# EAGLE board axiom_beta_board_100_v0.8_test-default.6734f072 (EAGLE 7.7.0), part 1 of 2
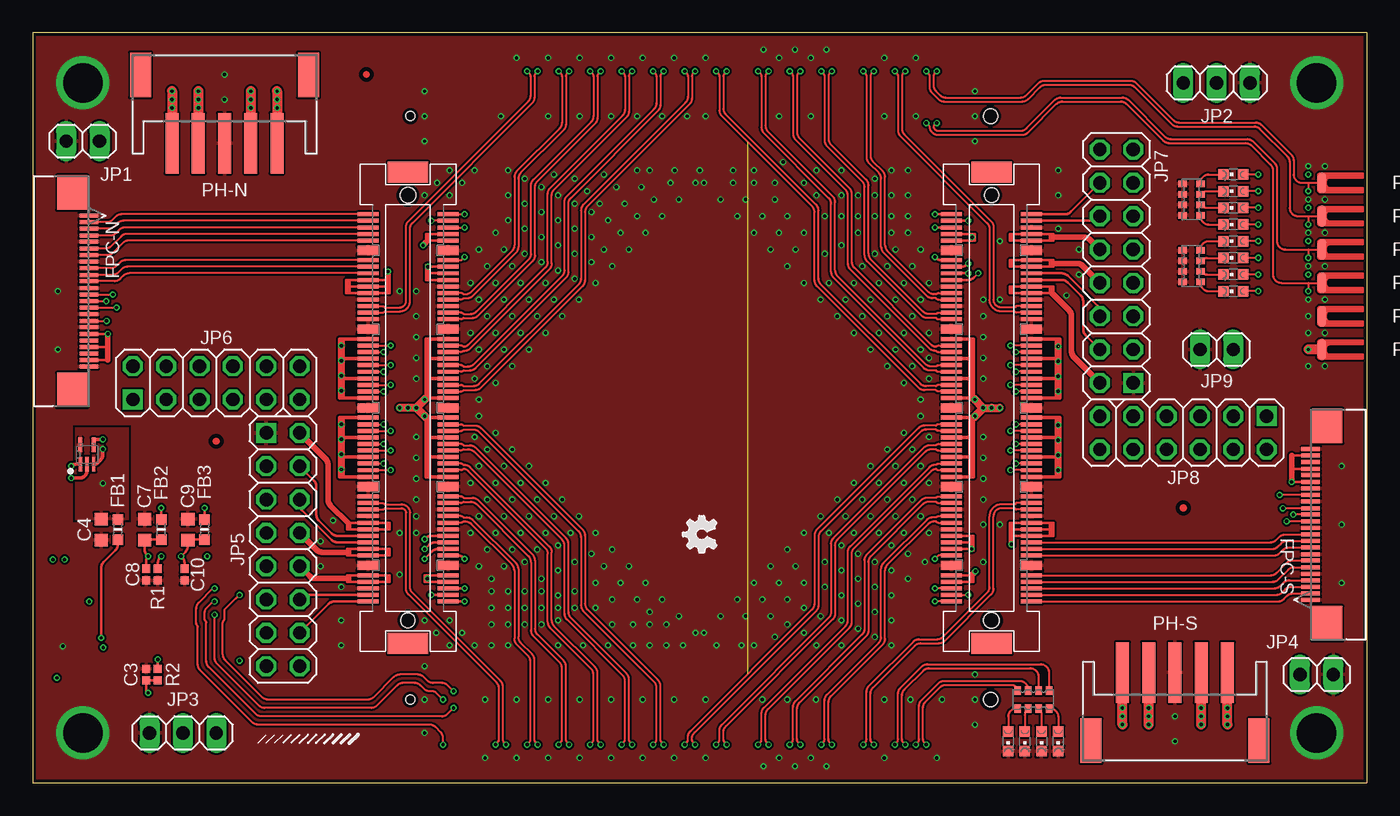
[diagram p0: board, top side]
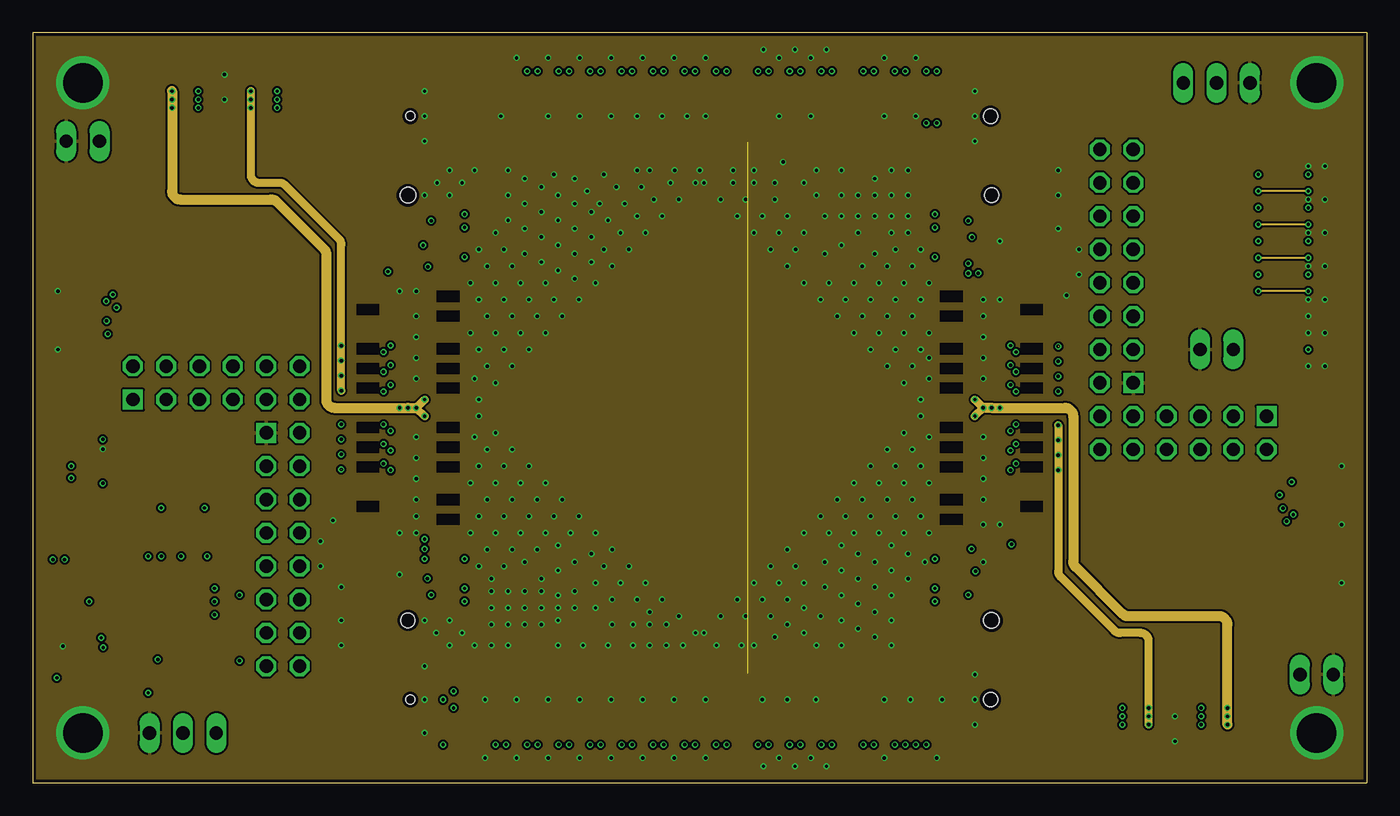
[diagram p1: board, inner layer Route2]
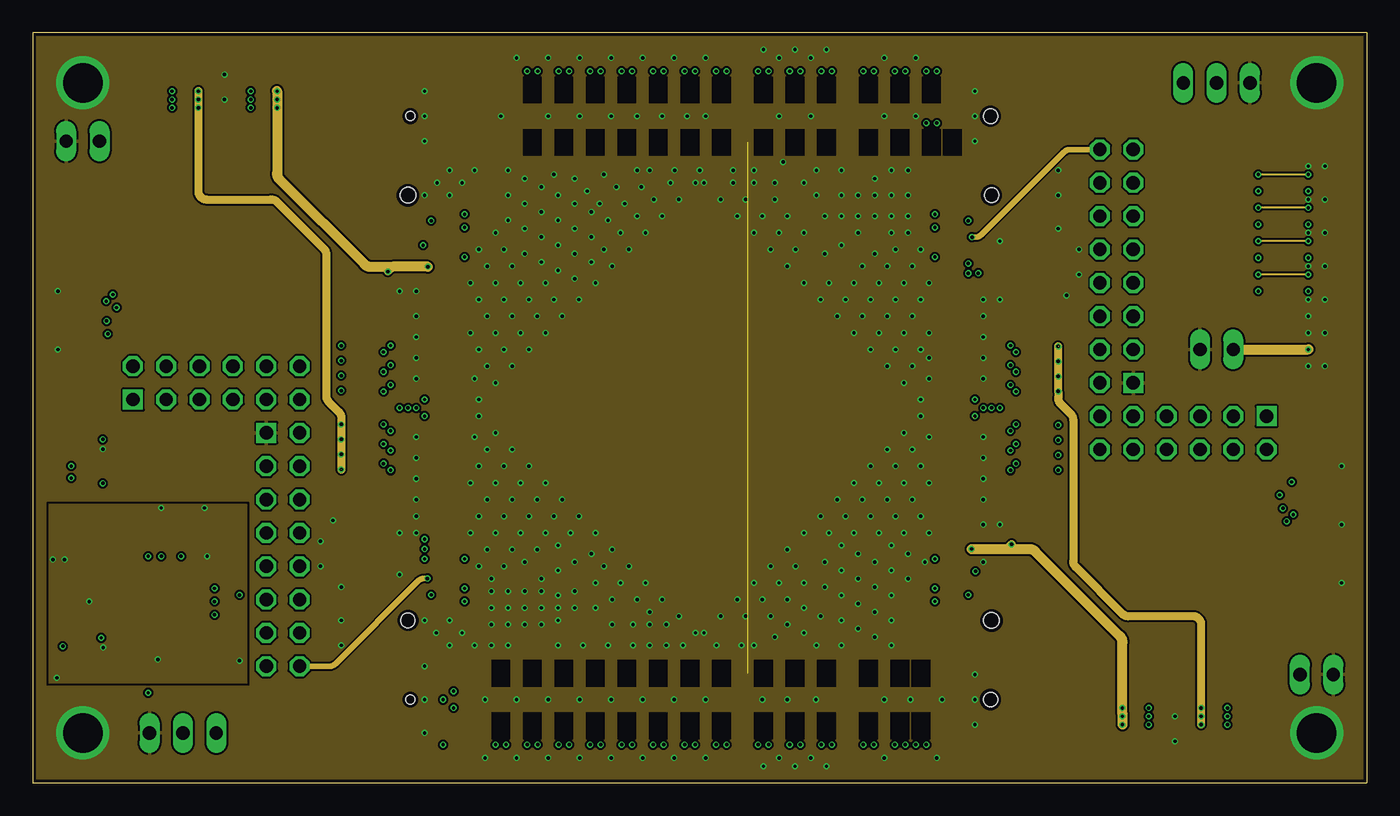
[diagram p2: board, inner layer Route15]
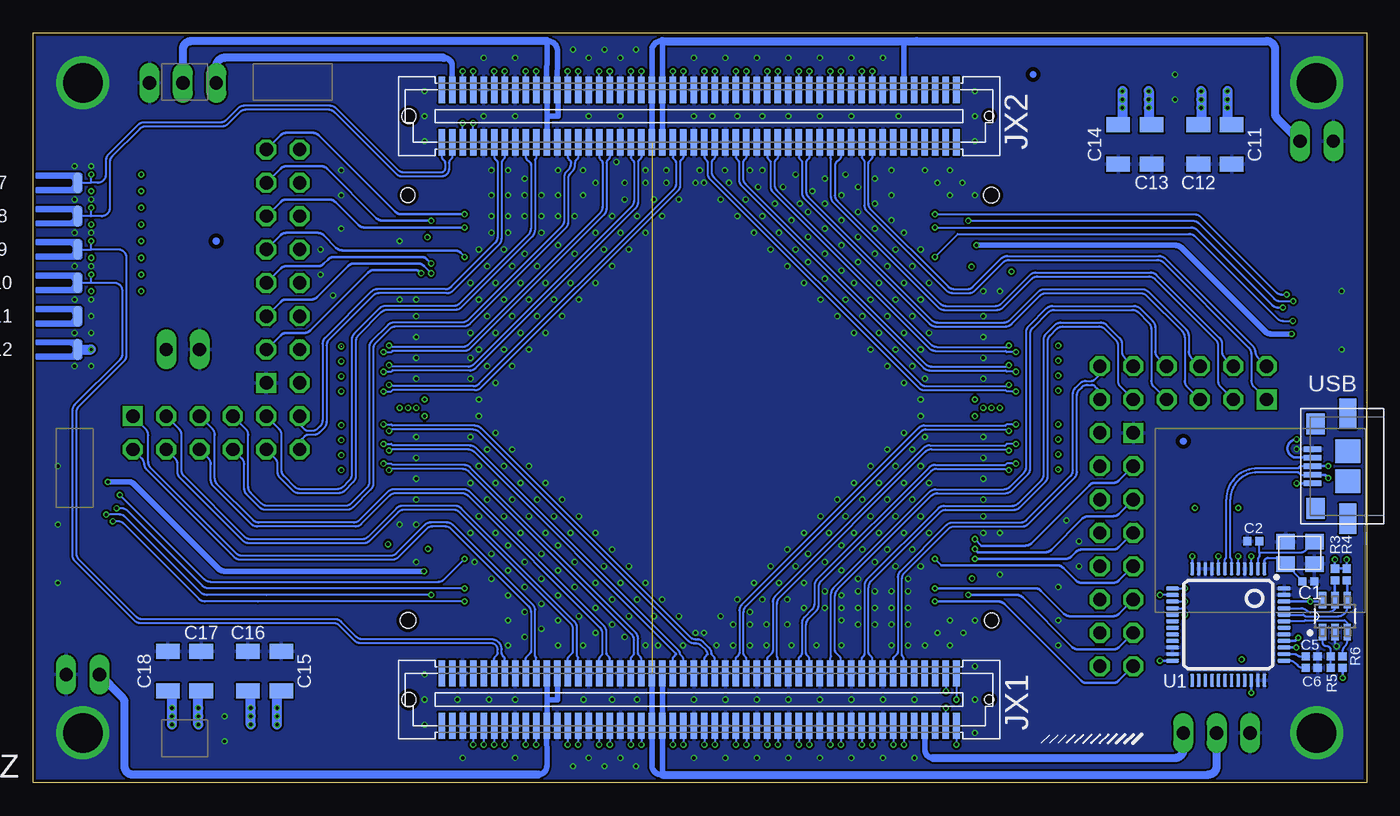
[diagram p3: board, bottom side, seen from below]

Size 101.6 x 57.15 mm. Coordinates in mm from the lower left corner, seen from the top.
Outline: 0,0 101.6,0 101.6,57.15 0,57.15 0,0
Copper layers (1*2*15*16): Top 0.035559375mm / dielectric 0.17018125mm / Route2 0.01778125mm / dielectric 47mil / Route15 0.01778125mm / dielectric 0.17018125mm / Bottom 0.035559375mm
Design rules "OSHPark-4layer-tuned *": minimum track width 5mil, minimum drill 10mil, track to track 6mil, track to pad 5mil, pad to pad 5mil, via to via 5mil, smd to smd 5mil, copper to edge 10mil, drill to drill 6mil, minimum pad ring 4mil, minimum via ring 4mil, stop-mask expansion 2mil, vias tented up to drill 15mil, thermal gap 6mil
Net classes: 0 default: width 0.152 mm, drill 0.254 mm, clearance 0.152 mm; 1 LVDS: width 0.152 mm, drill 0.254 mm, clearance 0.152 mm
tKeepout: area 1.3,1.3 to 6.3,6.3; area 1.3,50.8 to 6.3,55.8; area 95.3,50.8 to 100.3,55.8; area 95.3,1.3 to 100.3,6.3; area 34.6,12.4 to 67,44.7
bKeepout: area 1.3,1.3 to 6.3,6.3; area 1.3,50.8 to 6.3,55.8; area 95.3,50.8 to 100.3,55.8; area 95.3,1.3 to 100.3,6.3
tRestrict: area 13.4,25.5 to 14.5,26.6; area 24.8,53.4 to 26,54.5; area 87.1,20.4 to 88.2,21.5
bRestrict: area 13.4,25.5 to 14.5,26.6; area 24.8,53.4 to 26,54.5; area 87.1,40.7 to 88.2,41.8

## Footprints (pad centres in the part's own frame; a part is rotated, then mirrored left to right if it is on the bottom)
0402-B = smd 0.62 x 0.62: 1 -0.45,0; 2 0.45,0
0603-B = smd 0.95 x 1: 1 -0.8,0; 2 0.8,0
1206-B = smd 1.15 x 1.8: 1 -1.5,0; 2 1.5,0
_0603MP = smd 0.8 x 0.8: 1 -0.762,0; 2 0.762,0
FCI_SFV24R-2STE1LF = smd 0.305 x 1.397: 1 5.74,2.083; 2 5.258,2.083; 3 4.75,2.083; 4 4.242,2.083; 5 3.759,2.083; 6 3.251,2.083; 7 2.743,2.083; 8 2.261,2.083; 9 1.753,2.083; 10 1.245,2.083; 11 0.762,2.083; 12 0.254,2.083; 13 -0.254,2.083; 14 -0.762,2.083; 15 -1.245,2.083; 16 -1.753,2.083; 17 -2.261,2.083; 18 -2.743,2.083; 19 -3.251,2.083; 20 -3.759,2.083; 21 -4.242,2.083; 22 -4.75,2.083; 23 -5.258,2.083; 24 -5.74,2.083 | smd 2.642 x 2.311: 25 -7.518,3.353; 26 7.518,3.353
1X02 = drill 1.016 long: 1 -1.27,0; 2 1.27,0
1X03 = drill 1.016 long: 1 -2.54,0; 2 0,0; 3 2.54,0
2X08 = drill 1.016 square: 1 -8.89,-1.27 | drill 1.016 octagon: 2 -8.89,1.27; 3 -6.35,-1.27; 4 -6.35,1.27; 5 -3.81,-1.27; 6 -3.81,1.27; 7 -1.27,-1.27; 8 -1.27,1.27; 9 1.27,-1.27; 10 1.27,1.27; 11 3.81,-1.27; 12 3.81,1.27; 13 6.35,-1.27; 14 6.35,1.27; 15 8.89,-1.27; 16 8.89,1.27
2X06 = drill 1.016 square: 1 -6.35,-1.27 | drill 1.016 octagon: 2 -6.35,1.27; 3 -3.81,-1.27; 4 -3.81,1.27; 5 -1.27,-1.27; 6 -1.27,1.27; 7 1.27,-1.27; 8 1.27,1.27; 9 3.81,-1.27; 10 3.81,1.27; 11 6.35,-1.27; 12 6.35,1.27
CHIPLED_0603 = smd 0.8 x 0.8: A 0,-0.75; C 0,0.75
1.6X3.8U-MM = smd 1.6 x 0.6: 1 0,-1.5
JST-PH-5-SMT-RA = smd 1 x 4.6: 1 -4,-2.7; 2 -2,-2.7; 3 0,-2.7; 4 2,-2.7; 5 4,-2.7 | smd 1.6 x 3.4: M1 -6.4,2.5; M2 6.4,2.5
ABM8G = smd 1.4 x 1.2: 1 -1.1,-0.85; 2 1.1,-0.85; 3 1.1,0.85; 4 -1.1,0.85
CAY16 = smd 0.5 x 0.65: 1 -1.2,-0.675; 2 -0.4,-0.675; 3 0.4,-0.675; 4 1.2,-0.675; 5 1.2,0.675; 6 0.4,0.675; 7 -0.4,0.675; 8 -1.2,0.675
LQFP48 = smd 0.3 x 1: 1 -2.75,-4.25; 2 -2.25,-4.25; 3 -1.75,-4.25; 4 -1.25,-4.25; 5 -0.75,-4.25; 6 -0.25,-4.25; 7 0.25,-4.25; 8 0.75,-4.25; 9 1.25,-4.25; 10 1.75,-4.25; 11 2.25,-4.25; 12 2.75,-4.25; 25 2.75,4.25; 26 2.25,4.25; 27 1.75,4.25; 28 1.25,4.25; 29 0.75,4.25; 30 0.25,4.25; 31 -0.25,4.25; 32 -0.75,4.25; 33 -1.25,4.25; 34 -1.75,4.25; 35 -2.25,4.25; 36 -2.75,4.25 | smd 1 x 0.3: 13 4.25,-2.75; 14 4.25,-2.25; 15 4.25,-1.75; 16 4.25,-1.25; 17 4.25,-0.75; 18 4.25,-0.25; 19 4.25,0.25; 20 4.25,0.75; 21 4.25,1.25; 22 4.25,1.75; 23 4.25,2.25; 24 4.25,2.75; 37 -4.25,2.75; 38 -4.25,2.25; 39 -4.25,1.75; 40 -4.25,1.25; 41 -4.25,0.75; 42 -4.25,0.25; 43 -4.25,-0.25; 44 -4.25,-0.75; 45 -4.25,-1.25; 46 -4.25,-1.75; 47 -4.25,-2.25; 48 -4.25,-2.75
SOT95P280X145-6N = smd 1.27 x 0.559: 1 -1.219,0.94; 2 -1.219,0; 3 -1.219,-0.94; 4 1.219,-0.94; 5 1.219,0; 6 1.219,0.94
SOT50P160X60-5N = smd 1.118 x 0.254: 1 -0.737,0.508; 2 -0.737,0; 3 -0.737,-0.508 | smd 1.118 x 0.305: 4 0.737,-0.508; 5 0.737,0.508
MICRO-AB-H-SMT = smd 0.4 x 1.35: 1 -1.3,4.125; 2 -0.65,4.125; 3 0,4.125; 4 0.65,4.125; 5 1.3,4.125 | smd 2.3 x 1.3: Z1 -4,1.45; Z4 4,1.45 | smd 1.8 x 1.9: Z2 -1.15,1.45; Z3 1.15,1.45 | smd 1.6 x 1.4: Z5 -3.2,3.9; Z6 3.2,3.9
FX10A-100S/10 = smd 0.3 x 1.6: 1 -14.75,-3.05; 2 -14.75,3.05; 3 -14.25,-3.05; 4 -14.25,3.05; 5 -13.75,-3.05; 6 -13.75,3.05; 7 -13.25,-3.05; 8 -13.25,3.05; 9 -12.75,-3.05; 10 -12.75,3.05; 11 -11.25,-3.05; 12 -11.25,3.05; 13 -10.75,-3.05; 14 -10.75,3.05; 15 -10.25,-3.05; 16 -10.25,3.05; 17 -9.75,-3.05; 18 -9.75,3.05; 19 -9.25,-3.05; 20 -9.25,3.05; 21 -8.75,-3.05; 22 -8.75,3.05; 23 -8.25,-3.05; 24 -8.25,3.05; 25 -7.75,-3.05; 26 -7.75,3.05; 27 -7.25,-3.05; 28 -7.25,3.05; 29 -6.75,-3.05; 30 -6.75,3.05; 31 -5.25,-3.05; 32 -5.25,3.05; 33 -4.75,-3.05; 34 -4.75,3.05; 35 -4.25,-3.05; 36 -4.25,3.05; 37 -3.75,-3.05; 38 -3.75,3.05; 39 -3.25,-3.05; 40 -3.25,3.05; 41 -2.75,-3.05; 42 -2.75,3.05; 43 -2.25,-3.05; 44 -2.25,3.05; 45 -1.75,-3.05; 46 -1.75,3.05; 47 -1.25,-3.05; 48 -1.25,3.05; 49 -0.75,-3.05; 50 -0.75,3.05; 51 0.75,-3.05; 52 0.75,3.05; 53 1.25,-3.05; 54 1.25,3.05; 55 1.75,-3.05; 56 1.75,3.05; 57 2.25,-3.05; 58 2.25,3.05; 59 2.75,-3.05; 60 2.75,3.05; 61 3.25,-3.05; 62 3.25,3.05; 63 3.75,-3.05; 64 3.75,3.05; 65 4.25,-3.05; 66 4.25,3.05; 67 4.75,-3.05; 68 4.75,3.05; 69 5.25,-3.05; 70 5.25,3.05; 71 6.75,-3.05; 72 6.75,3.05; 73 7.25,-3.05; 74 7.25,3.05; 75 7.75,-3.05; 76 7.75,3.05; 77 8.25,-3.05; 78 8.25,3.05; 79 8.75,-3.05; 80 8.75,3.05; 81 9.25,-3.05; 82 9.25,3.05; 83 9.75,-3.05; 84 9.75,3.05; 85 10.25,-3.05; 86 10.25,3.05; 87 10.75,-3.05; 88 10.75,3.05; 89 11.25,-3.05; 90 11.25,3.05; 91 12.75,-3.05; 92 12.75,3.05; 93 13.25,-3.05; 94 13.25,3.05; 95 13.75,-3.05; 96 13.75,3.05; 97 14.25,-3.05; 98 14.25,3.05; 99 14.75,-3.05; 100 14.75,3.05 | smd 0.7 x 1.6: G1 -12,-3.05; G2 -12,3.05; G3 -6,-3.05; G4 -6,3.05; G5 0,-3.05; G6 0,3.05; G7 6,-3.05; G8 6,3.05; G9 12,-3.05; G10 12,3.05 | smd 1.6 x 3.1: M1 -17.95,0; M2 17.95,0 | hole 1.1: -16.2,0 | hole 1.2: 16.2,0
µZ-NOHOLES = smd 0.5 x 2: 1 70.347,4.349; 2 70.347,8.349; 3 69.547,4.349; 4 69.547,8.349; 5 68.747,4.349; 6 68.747,8.349; 7 67.947,4.349; 8 67.947,8.349; 9 67.147,4.349; 10 67.147,8.349; 11 66.347,4.349; 12 66.347,8.349; 13 65.547,4.349; 14 65.547,8.349; 15 64.747,4.349; 16 64.747,8.349; 17 63.947,4.349; 18 63.947,8.349; 19 63.147,4.349; 20 63.147,8.349; 21 62.347,4.349; 22 62.347,8.349; 23 61.547,4.349; 24 61.547,8.349; 25 60.747,4.349; 26 60.747,8.349; 27 59.947,4.349; 28 59.947,8.349; 29 59.147,4.349; 30 59.147,8.349; 31 58.347,4.349; 32 58.347,8.349; 33 57.547,4.349; 34 57.547,8.349; 35 56.747,4.349; 36 56.747,8.349; 37 55.947,4.349; 38 55.947,8.349; 39 55.147,4.349; 40 55.147,8.349; 41 54.347,4.349; 42 54.347,8.349; 43 53.547,4.349; 44 53.547,8.349; 45 52.747,4.349; 46 52.747,8.349; 47 51.947,4.349; 48 51.947,8.349; 49 51.147,4.349; 50 51.147,8.349; 51 50.347,4.349; 52 50.347,8.349; 53 49.547,4.349; 54 49.547,8.349; 55 48.747,4.349; 56 48.747,8.349; 57 47.947,4.349; 58 47.947,8.349; 59 47.147,4.349; 60 47.147,8.349; 61 46.347,4.349; 62 46.347,8.349; 63 45.547,4.349; 64 45.547,8.349; 65 44.747,4.349; 66 44.747,8.349; 67 43.947,4.349; 68 43.947,8.349; 69 43.147,4.349; 70 43.147,8.349; 71 42.347,4.349; 72 42.347,8.349; 73 41.547,4.349; 74 41.547,8.349; 75 40.747,4.349; 76 40.747,8.349; 77 39.947,4.349; 78 39.947,8.349; 79 39.147,4.349; 80 39.147,8.349; 81 38.347,4.349; 82 38.347,8.349; 83 37.547,4.349; 84 37.547,8.349; 85 36.747,4.349; 86 36.747,8.349; 87 35.947,4.349; 88 35.947,8.349; 89 35.147,4.349; 90 35.147,8.349; 91 34.347,4.349; 92 34.347,8.349; 93 33.547,4.349; 94 33.547,8.349; 95 32.747,4.349; 96 32.747,8.349; 97 31.947,4.349; 98 31.947,8.349; 99 31.147,4.349; 100 31.147,8.349; 101 70.347,48.801; 102 70.347,52.801; 103 69.547,48.801; 104 69.547,52.801; 105 68.747,48.801; 106 68.747,52.801; 107 67.947,48.801; 108 67.947,52.801; 109 67.147,48.801; 110 67.147,52.801; 111 66.347,48.801; 112 66.347,52.801; 113 65.547,48.801; 114 65.547,52.801; 115 64.747,48.801; 116 64.747,52.801; 117 63.947,48.801; 118 63.947,52.801; 119 63.147,48.801; 120 63.147,52.801; 121 62.347,48.801; 122 62.347,52.801; 123 61.547,48.801; 124 61.547,52.801; 125 60.747,48.801; 126 60.747,52.801; 127 59.947,48.801; 128 59.947,52.801; 129 59.147,48.801; 130 59.147,52.801; 131 58.347,48.801; 132 58.347,52.801; 133 57.547,48.801; 134 57.547,52.801; 135 56.747,48.801; 136 56.747,52.801; 137 55.947,48.801; 138 55.947,52.801; 139 55.147,48.801; 140 55.147,52.801; 141 54.347,48.801; 142 54.347,52.801; 143 53.547,48.801; 144 53.547,52.801; 145 52.747,48.801; 146 52.747,52.801; 147 51.947,48.801; 148 51.947,52.801; 149 51.147,48.801; 150 51.147,52.801; 151 50.347,48.801; 152 50.347,52.801; 153 49.547,48.801; 154 49.547,52.801; 155 48.747,48.801; 156 48.747,52.801; 157 47.947,48.801; 158 47.947,52.801; 159 47.147,48.801; 160 47.147,52.801; 161 46.347,48.801; 162 46.347,52.801; 163 45.547,48.801; 164 45.547,52.801; 165 44.747,48.801; 166 44.747,52.801; 167 43.947,48.801; 168 43.947,52.801; 169 43.147,48.801; 170 43.147,52.801; 171 42.347,48.801; 172 42.347,52.801; 173 41.547,48.801; 174 41.547,52.801; 175 40.747,48.801; 176 40.747,52.801; 177 39.947,48.801; 178 39.947,52.801; 179 39.147,48.801; 180 39.147,52.801; 181 38.347,48.801; 182 38.347,52.801; 183 37.547,48.801; 184 37.547,52.801; 185 36.747,48.801; 186 36.747,52.801; 187 35.947,48.801; 188 35.947,52.801; 189 35.147,48.801; 190 35.147,52.801; 191 34.347,48.801; 192 34.347,52.801; 193 33.547,48.801; 194 33.547,52.801; 195 32.747,48.801; 196 32.747,52.801; 197 31.947,48.801; 198 31.947,52.801; 199 31.147,48.801; 200 31.147,52.801 | hole 1.1: 28.647,6.35; 28.647,50.8 | hole 0.7: 72.847,6.35; 72.847,50.8

## Placement (x,y rotation side)
C1  [0402-B]  4.45,15.37 0 bottom
C2  [0402-B]  8.64,18.41 180 bottom
C3  10n  [0402-B]  8.64,8.25 90 top
C4  100n  [0603-B]  5.21,19.3 270 top
C5  100n  [0402-B]  4.19,9.65 0 bottom
C6  100n  [0402-B]  4.19,8.76 0 bottom
C7  4µ7  [0603-B]  8.51,19.3 90 top
C8  100n  [0402-B]  8.64,15.88 270 top
C9  4µ7  [0603-B]  11.81,19.3 90 top
C10  100n  [0402-B]  11.56,15.88 270 top
C11  [1206-B]  10.29,48.64 270 bottom
C12  [1206-B]  12.83,48.64 270 bottom
C13  [1206-B]  16.38,48.64 270 bottom
C14  [1206-B]  18.92,48.64 270 bottom
C15  [1206-B]  82.68,8.51 90 bottom
C16  [1206-B]  85.22,8.51 90 bottom
C17  [1206-B]  88.77,8.51 90 bottom
C18  [1206-B]  91.31,8.51 90 bottom
FB1  600R  [_0603MP]  6.48,19.3 270 top
FB2  600R  [_0603MP]  9.78,19.3 270 top
FB3  600R  [_0603MP]  13.08,19.3 270 top
FPC-N  SFV24R-2STE1LF  [FCI_SFV24R-2STE1LF]  6.35,37.47 90 top
FPC-S  SFV24R-2STE1LF  [FCI_SFV24R-2STE1LF]  95.25,19.68 270 top
JP1  [1X02]  3.81,48.89 180 top
JP2  [1X03]  90.17,53.34 0 top
JP3  [1X03]  11.43,3.81 180 top
JP4  [1X02]  97.79,8.25 0 top
JP5  [2X08]  19.05,17.78 270 top
JP6  [2X06]  13.97,30.48 0 top
JP7  [2X08]  82.55,39.37 90 top
JP8  [2X06]  87.63,26.67 180 top
JP9  [1X02]  90.17,33.02 180 top
LED1  [CHIPLED_0603]  91.44,46.36 90 top
LED2  [CHIPLED_0603]  91.44,45.09 90 top
LED3  [CHIPLED_0603]  91.44,43.81 90 top
LED4  [CHIPLED_0603]  91.44,42.55 90 top
LED5  [CHIPLED_0603]  91.44,41.27 90 top
LED6  [CHIPLED_0603]  91.44,40 90 top
LED7  [CHIPLED_0603]  91.44,38.73 90 top
LED8  [CHIPLED_0603]  91.44,37.47 90 top
LED9  [CHIPLED_0603]  74.3,3.18 180 top
LED10  [CHIPLED_0603]  75.56,3.18 180 top
LED11  [CHIPLED_0603]  76.83,3.18 180 top
LED12  [CHIPLED_0603]  78.1,3.18 180 top
LOGO1  OSHW_LOGO_FILLX0100-NT  [OSHW_FILLX100_NOTEXT]  52.07,17.53 90 top
PAD1  [1.6X3.8U-MM]  99.69,45.72 270 top
PAD2  [1.6X3.8U-MM]  99.69,43.18 270 top
PAD3  [1.6X3.8U-MM]  99.69,40.64 270 top
PAD4  [1.6X3.8U-MM]  99.69,38.1 270 top
PAD5  [1.6X3.8U-MM]  99.69,35.56 270 top
PAD6  [1.6X3.8U-MM]  99.69,33.02 270 top
PAD7  [1.6X3.8U-MM]  99.69,45.72 90 bottom
PAD8  [1.6X3.8U-MM]  99.69,43.18 90 bottom
PAD9  [1.6X3.8U-MM]  99.69,40.64 90 bottom
PAD10  [1.6X3.8U-MM]  99.69,38.1 90 bottom
PAD11  [1.6X3.8U-MM]  99.69,35.56 90 bottom
PAD12  [1.6X3.8U-MM]  99.69,33.02 90 bottom
PH-N  JST_5PIN  [JST-PH-5-SMT-RA]  14.6,51.44 0 top
PH-S  JST_5PIN  [JST-PH-5-SMT-RA]  87,5.71 180 top
Q1  SMD-4P-2G-3.2X2.5  [ABM8G]  5.08,17.53 0 bottom
R1  12k  [0402-B]  9.52,15.88 90 top
R2  10k  [0402-B]  9.52,8.25 90 top
R3  10k  [0402-B]  2.41,15.88 90 bottom
R4  10k  [0402-B]  1.52,15.88 90 bottom
R5  10k  [0402-B]  2.29,8.76 0 bottom
R6  2k  [0402-B]  2.29,9.65 0 bottom
RN1  [CAY16]  88.27,44.45 270 top
RN2  [CAY16]  88.27,39.37 270 top
RN3  [CAY16]  76.2,6.35 0 top
U1  FT232H  [LQFP48]  10.54,12.06 180 bottom
U2  93LC46BT-I/OT  [SOT95P280X145-6N]  2.41,12.7 90 bottom
U3  TPD3E001DRLR  [SOT50P160X60-5N]  4.13,25.02 90 top
USB  5_USB_3S  [MICRO-AB-H-SMT]  0,24.13 90 bottom
X-EAST  FX10-100/10S  [FX10A-100S/10]  73.03,28.57 270 top
X-WEST  FX10-100/10S  [FX10A-100S/10]  28.57,28.57 90 top
ZED1  µZ-FCI-NOHOLES  [µZ-NOHOLES]  101.6,0 0 bottom

## Library data of the parts
C1-C18 R1-R6 = generic-rcl
FB1-FB3 = microbuilder
FPC-N FPC-S = FCI_By_element14_Batch_1; MPN: SFV24R-2STE1LF; OC_FARNELL: -; OC_NEWARK: 62K5584; PACKAGE: CONNECTOR - 24POS; SUPPLIER: FCI
JP1-JP9 = pinhead-2
LED1-LED12 = led
LOGO1 = ohw-logo
PAD1-PAD12 = smd_pads
PH-N PH-S = jst-ph
Q1 = xtal
RN1-RN3 = resistor-dil; OC_FARNELL: unknown; OC_NEWARK: unknown
U1 = ft232h
U2 = 93lc46; MPN: 93LC46BT-I/OT; OC_FARNELL: 1556164; OC_NEWARK: 75M3689; PACKAGE: SOT-6; SUPPLIER: Microchip
U3 = esd; MPN: TPD3E001DRLR; OC_FARNELL: 1603422; OC_NEWARK: 41M5842; PACKAGE: SOT-5; SUPPLIER: Texas Instruments
USB = usb; TE: 1981584
X-EAST X-WEST = fx10
ZED1 = microzed

## Nets
BANK13_00_N [LVDS]: RN3.6 ZED1.89
BANK13_00_P [LVDS]: RN3.5 ZED1.87
BANK13_01_N [LVDS]: LED7.A PAD10.1 ZED1.90
BANK13_01_P [LVDS]: LED5.A PAD9.1 ZED1.88
BANK13_02_N [LVDS]: RN3.8 ZED1.93
BANK13_02_P [LVDS]: RN3.7 ZED1.91
BANK13_03_N [LVDS]: ZED1.94
BANK13_03_P [LVDS]: ZED1.92
BANK13_04_N [LVDS]: LED6.A PAD3.1 ZED1.195
BANK13_04_P [LVDS]: LED8.A PAD4.1 ZED1.193
BANK13_05_N: LED2.A PAD1.1 ZED1.196
BANK13_05_P: LED4.A PAD2.1 ZED1.194
BANK13_06_N [LVDS]: LED1.A PAD7.1 ZED1.199
BANK13_06_P [LVDS]: LED3.A PAD8.1 ZED1.197
E_EN: JP7.7 X-EAST.13
E_I2C_V: JP7.8 X-EAST.12 X-EAST.14
E_SCK: JP7.9 X-EAST.11
E_SCL: JP7.6 X-EAST.16
E_SDA: JP7.4 X-EAST.18
E_SDI: JP7.5 X-EAST.15
E_SDI_V: JP7.2 X-EAST.20 X-EAST.22
E_SDO: JP7.3 X-EAST.17
E_VE: C15.1 PH-S.5 X-EAST.80 X-EAST.82 X-EAST.83 X-EAST.84 X-EAST.85 X-EAST.87
E_VE_CV: FPC-S.17 X-EAST.89
E_VE_OV: FPC-S.6 X-EAST.94
E_VE_UV: FPC-S.7 X-EAST.92
EE_CLK1: R4.1 U1.44 U2.4
EE_CS1: R3.1 U1.45 U2.5
EE_DATA1: R6.2 U1.43 U2.3
FTDI_D_N: U1.6 U3.2 USB.2
FTDI_D_P: U1.7 U3.1 USB.3
FTDI_TCK: U1.13 ZED1.1
FTDI_TDI: U1.14 ZED1.4
FTDI_TDO: U1.15 ZED1.3
FTDI_TMS: U1.16 ZED1.2
GND: C1.2 C2.2 C3.2 C4.2 C5.2 C6.2 C7.2 C8.2 C9.2 C10.2 C11.2 C12.2 C13.2 C14.2 C15.2 C16.2 C17.2 C18.2 FPC-N.1 FPC-N.5 FPC-N.8 FPC-N.12 FPC-N.16 FPC-N.18 FPC-N.24 FPC-S.1 FPC-S.5 FPC-S.8 FPC-S.12 FPC-S.16 FPC-S.18 FPC-S.24 JP1.2 JP2.3 JP3.3 JP4.2 JP5.1 JP7.1 JP9.2 LED9.C LED10.C LED11.C LED12.C PAD5.1 PAD11.1 PH-N.3 PH-S.3 Q1.2 Q1.4 R1.1 RN1.1 RN1.2 RN1.3 RN1.4 RN2.1 RN2.2 RN2.3 RN2.4 U1.4 U1.9 U1.10 U1.11 U1.22 U1.23 U1.35 U1.36 U1.41 U1.47 U1.48 U2.2 U3.3 USB.5 X-EAST.6 X-EAST.19 X-EAST.24 X-EAST.25 X-EAST.30 X-EAST.72 X-EAST.75 X-EAST.78 X-EAST.81 X-EAST.G1 X-EAST.G2 X-EAST.G3 X-EAST.G4 X-EAST.G5 X-EAST.G6 X-EAST.G7 X-EAST.G8 X-EAST.G9 X-EAST.G10 X-WEST.6 X-WEST.19 X-WEST.24 X-WEST.25 X-WEST.30 X-WEST.72 X-WEST.75 X-WEST.78 X-WEST.81 X-WEST.G1 X-WEST.G2 X-WEST.G3 X-WEST.G4 X-WEST.G5 X-WEST.G6 X-WEST.G7 X-WEST.G8 X-WEST.G9 X-WEST.G10 ZED1.15 ZED1.16 ZED1.21 ZED1.22 ZED1.27 ZED1.28 ZED1.33 ZED1.34 ZED1.39 ZED1.40 ZED1.45 ZED1.46 ZED1.51 ZED1.52 ZED1.65 ZED1.66 ZED1.71 ZED1.72 ZED1.77 ZED1.85 ZED1.86 ZED1.95 ZED1.96 ZED1.115 ZED1.116 ZED1.121 ZED1.122 ZED1.127 ZED1.128 ZED1.133 ZED1.134 ZED1.139 ZED1.140 ZED1.145 ZED1.146 ZED1.151 ZED1.152 ZED1.165 ZED1.166 ZED1.171 ZED1.172 ZED1.177 ZED1.185 ZED1.186 ZED1.191 ZED1.192
JTAG_V: JP5.2 X-WEST.20 X-WEST.22
JX1_00_N [LVDS]: X-WEST.28 ZED1.13
JX1_00_P [LVDS]: X-WEST.26 ZED1.11
JX1_01_N [LVDS]: JP6.12 ZED1.14
JX1_01_P [LVDS]: JP6.11 ZED1.12
JX1_02_N [LVDS]: X-WEST.23 ZED1.19
JX1_02_P [LVDS]: X-WEST.21 ZED1.17
JX1_03_N [LVDS]: JP6.10 ZED1.20
JX1_03_P [LVDS]: JP6.9 ZED1.18
JX1_04_N [LVDS]: X-WEST.29 ZED1.25
JX1_04_P [LVDS]: X-WEST.27 ZED1.23
JX1_05_N: JP6.8 ZED1.26
JX1_05_P: JP6.7 ZED1.24
JX1_06_N [LVDS]: X-WEST.35 ZED1.31
JX1_06_P [LVDS]: X-WEST.33 ZED1.29
JX1_07_N [LVDS]: X-WEST.36 ZED1.32
JX1_07_P [LVDS]: X-WEST.34 ZED1.30
JX1_08_N: X-WEST.41 ZED1.37
JX1_08_P: X-WEST.39 ZED1.35
JX1_09_N [LVDS]: X-WEST.42 ZED1.38
JX1_09_P [LVDS]: X-WEST.40 ZED1.36
JX1_10_N [LVDS]: X-WEST.47 ZED1.43
JX1_10_P [LVDS]: X-WEST.45 ZED1.41
JX1_11_N [LVDS]: X-WEST.48 ZED1.44
JX1_11_P [LVDS]: X-WEST.46 ZED1.42
JX1_12_N [LVDS]: X-EAST.55 ZED1.49
JX1_12_P [LVDS]: X-EAST.53 ZED1.47
JX1_13_N [LVDS]: X-EAST.56 ZED1.50
JX1_13_P [LVDS]: X-EAST.54 ZED1.48
JX1_14_N [LVDS]: X-EAST.61 ZED1.55
JX1_14_P [LVDS]: X-EAST.59 ZED1.53
JX1_15_N: X-EAST.62 ZED1.56
JX1_15_P: X-EAST.60 ZED1.54
JX1_16_N [LVDS]: X-EAST.67 ZED1.63
JX1_16_P [LVDS]: X-EAST.65 ZED1.61
JX1_17_N [LVDS]: X-EAST.68 ZED1.64
JX1_17_P [LVDS]: X-EAST.66 ZED1.62
JX1_18_N [LVDS]: X-EAST.73 ZED1.69
JX1_18_P [LVDS]: X-EAST.71 ZED1.67
JX1_19_N [LVDS]: JP8.6 ZED1.70
JX1_19_P [LVDS]: JP8.5 ZED1.68
JX1_20_N: X-EAST.79 ZED1.75
JX1_20_P: X-EAST.77 ZED1.73
JX1_21_N: JP8.4 ZED1.76
JX1_21_P: JP8.3 ZED1.74
JX1_22_N: X-EAST.76 ZED1.83
JX1_22_P: X-EAST.74 ZED1.81
JX1_23_N [LVDS]: JP8.2 ZED1.84
JX1_23_P [LVDS]: JP8.1 ZED1.82
JX2_00_N [LVDS]: JP6.1 ZED1.119
JX2_00_P [LVDS]: JP6.2 ZED1.117
JX2_01_N [LVDS]: X-WEST.74 ZED1.120
JX2_01_P [LVDS]: X-WEST.76 ZED1.118
JX2_02_N [LVDS]: JP6.3 ZED1.125
JX2_02_P [LVDS]: JP6.4 ZED1.123
JX2_03_N [LVDS]: X-WEST.77 ZED1.126
JX2_03_P [LVDS]: X-WEST.79 ZED1.124
JX2_04_N [LVDS]: JP6.5 ZED1.131
JX2_04_P [LVDS]: JP6.6 ZED1.129
JX2_05_N [LVDS]: X-WEST.71 ZED1.132
JX2_05_P [LVDS]: X-WEST.73 ZED1.130
JX2_06_N [LVDS]: X-WEST.66 ZED1.137
JX2_06_P [LVDS]: X-WEST.68 ZED1.135
JX2_07_N [LVDS]: X-WEST.65 ZED1.138
JX2_07_P [LVDS]: X-WEST.67 ZED1.136
JX2_08_N [LVDS]: X-WEST.60 ZED1.143
JX2_08_P [LVDS]: X-WEST.62 ZED1.141
JX2_09_N [LVDS]: X-WEST.59 ZED1.144
JX2_09_P [LVDS]: X-WEST.61 ZED1.142
JX2_10_N [LVDS]: X-WEST.54 ZED1.149
JX2_10_P [LVDS]: X-WEST.56 ZED1.147
JX2_11_N [LVDS]: X-WEST.53 ZED1.150
JX2_11_P [LVDS]: X-WEST.55 ZED1.148
JX2_12_N [LVDS]: X-EAST.46 ZED1.155
JX2_12_P [LVDS]: X-EAST.48 ZED1.153
JX2_13_N [LVDS]: X-EAST.45 ZED1.156
JX2_13_P [LVDS]: X-EAST.47 ZED1.154
JX2_14_N: X-EAST.40 ZED1.163
JX2_14_P: X-EAST.42 ZED1.161
JX2_15_N [LVDS]: X-EAST.39 ZED1.164
JX2_15_P [LVDS]: X-EAST.41 ZED1.162
JX2_16_N [LVDS]: X-EAST.34 ZED1.169
JX2_16_P [LVDS]: X-EAST.36 ZED1.167
JX2_17_N [LVDS]: X-EAST.33 ZED1.170
JX2_17_P [LVDS]: X-EAST.35 ZED1.168
JX2_18_N [LVDS]: JP8.7 ZED1.175
JX2_18_P [LVDS]: JP8.8 ZED1.173
JX2_19_N [LVDS]: X-EAST.27 ZED1.176
JX2_19_P [LVDS]: X-EAST.29 ZED1.174
JX2_20_N [LVDS]: JP8.9 ZED1.183
JX2_20_P [LVDS]: JP8.10 ZED1.181
JX2_21_N [LVDS]: X-EAST.21 ZED1.184
JX2_21_P [LVDS]: X-EAST.23 ZED1.182
JX2_22_N: JP8.11 ZED1.189
JX2_22_P: JP8.12 ZED1.187
JX2_23_N [LVDS]: X-EAST.26 ZED1.190
JX2_23_P [LVDS]: X-EAST.28 ZED1.188
N$1: ZED1.9
N$46: ZED1.10
N$47: ZED1.113
N$48: ZED1.114
N$49: ZED1.200
N$50: ZED1.97
N$51: ZED1.99
N$52: ZED1.98
N$53: ZED1.100
N$98: FPC-N.20
N$99: FPC-N.22
N$105: LED1.C RN1.8
N$106: LED2.C RN1.7
N$107: LED3.C RN1.6
N$108: LED4.C RN1.5
N$109: LED5.C RN2.8
N$113: LED6.C RN2.7
N$114: LED7.C RN2.6
N$115: LED8.C RN2.5
N$116: LED9.A RN3.1
N$117: LED10.A RN3.2
N$118: LED11.A RN3.3
N$119: LED12.A RN3.4
N$122: FPC-S.20
N$123: FPC-S.22
N$177: R5.1 R6.1 U2.1
N$178: C1.1 Q1.1 U1.1
N$179: C2.1 Q1.3 U1.2
N$180: C3.1 R2.1 U1.34
N$181: R1.2 U1.5
N$182: U3.4 USB.4
N_CHK_V: FPC-N.19 FPC-N.21 FPC-N.23 X-WEST.91 X-WEST.93
N_I2C_V: JP7.10 X-EAST.8 X-EAST.10
N_SCK: JP7.15 X-EAST.1
N_SCL: JP7.14 X-EAST.2
N_SDA: JP7.12 X-EAST.4
N_SDI: JP7.11 X-EAST.5
N_SDO: JP7.13 X-EAST.3
N_SPI_V: JP7.16 X-EAST.7 X-EAST.9
N_VE: C17.1 PH-S.2 X-EAST.32 X-EAST.38 X-EAST.44 X-EAST.50
N_VE_CV: FPC-N.15 X-WEST.95
N_VE_OV: FPC-N.4 X-WEST.96
N_VE_UV: FPC-N.11 X-WEST.86
N_VN: C11.1 PH-N.1 X-WEST.31 X-WEST.37 X-WEST.43 X-WEST.49 X-WEST.51 X-WEST.57 X-WEST.63 X-WEST.69
N_VN_CV: FPC-N.14 X-WEST.97
N_VN_OV: FPC-N.3 X-WEST.98
N_VN_UV: FPC-N.10 X-WEST.88
N_VW: C13.1 PH-N.4 X-WEST.52 X-WEST.58 X-WEST.64 X-WEST.70
N_VW_CV: FPC-N.13 X-WEST.99
N_VW_OV: FPC-N.2 X-WEST.100
N_VW_UV: FPC-N.9 X-WEST.90
PMOD_VCC [LVDS]: JP9.1 PAD6.1 PAD12.1
S_CHK_V: FPC-S.19 FPC-S.21 FPC-S.23 X-EAST.91 X-EAST.93
S_I2C_V: JP5.10 X-WEST.8 X-WEST.10
S_SCK: JP5.15 X-WEST.1
S_SCL: JP5.14 X-WEST.2
S_SDA: JP5.12 X-WEST.4
S_SDI: JP5.11 X-WEST.5
S_SDO: JP5.13 X-WEST.3
S_SPI_V: JP5.16 X-WEST.7 X-WEST.9
S_VE: C16.1 PH-S.4 X-EAST.52 X-EAST.58 X-EAST.64 X-EAST.70
S_VE_CV: FPC-S.13 X-EAST.99
S_VE_OV: FPC-S.2 X-EAST.100
S_VE_UV: FPC-S.9 X-EAST.90
S_VS: C18.1 PH-S.1 X-EAST.31 X-EAST.37 X-EAST.43 X-EAST.49 X-EAST.51 X-EAST.57 X-EAST.63 X-EAST.69
S_VS_CV: FPC-S.14 X-EAST.97
S_VS_OV: FPC-S.3 X-EAST.98
S_VS_UV: FPC-S.10 X-EAST.88
S_VW: C12.1 PH-N.2 X-WEST.32 X-WEST.38 X-WEST.44 X-WEST.50
S_VW_CV: FPC-S.15 X-EAST.95
S_VW_OV: FPC-S.4 X-EAST.96
S_VW_UV: FPC-S.11 X-EAST.86
TCK: JP5.9 X-WEST.11
TDI: JP5.5 X-WEST.15
TDO: JP5.3 X-WEST.17
TMS: JP5.7 X-WEST.13
VBAT: JP3.1 ZED1.7
VBUS: C4.1 FB1.1 U3.5 USB.1
VCCA: C6.1 U1.37
VCCD: FB2.1 FB3.1 R2.2 R3.2 R4.2 R5.2 U1.12 U1.24 U1.39 U1.46 U2.6
VCCO_13 [LVDS]: JP2.1 ZED1.198
VCCO_34: JP4.1 ZED1.78 ZED1.79 ZED1.80
VCCO_35: JP2.2 ZED1.178 ZED1.179 ZED1.180
VCORE: C5.1 U1.38
VIN_HDR [LVDS]: JP1.1 JP3.2 ZED1.57 ZED1.58 ZED1.59 ZED1.60 ZED1.112 ZED1.157 ZED1.158 ZED1.159 ZED1.160
VPHY: C7.1 C8.1 FB2.2 U1.3
VPLL: C9.1 C10.1 FB3.2 U1.8
VREGIN: FB1.2 U1.40
W_I2C_V: JP5.8 X-WEST.12 X-WEST.14
W_SCL: JP5.6 X-WEST.16
W_SDA: JP5.4 X-WEST.18
W_VW: C14.1 PH-N.5 X-WEST.80 X-WEST.82 X-WEST.83 X-WEST.84 X-WEST.85 X-WEST.87
W_VW_CV: FPC-N.17 X-WEST.89
W_VW_OV: FPC-N.6 X-WEST.94
W_VW_UV: FPC-N.7 X-WEST.92

## Tracks (layer width: path | path; a pad name or v marks a point on that pad's centre or on a via)
BANK13_00_N  (via drill 0.25)
  Top 0.152: v66.45,2.92 66.32,3.06 arc-45 66.2,3.33 66.2,6.67 arc-45 66.39,7.12 67.82,8.55 arc-45 68.27,8.74 75.97,8.74 arc-90 76.6,8.1 RN3.6
  Bottom 0.152: ZED1.89 v66.45,2.92
BANK13_00_P  (via drill 0.25)
  Top 0.152: v65.65,2.92 65.79,3.06 arc45 65.9,3.33 65.9,6.8 arc-45 66.09,7.25 67.7,8.86 arc-45 68.14,9.04 76.77,9.04 arc-90 77.4,8.41 RN3.5
  Bottom 0.152: ZED1.87 v65.65,2.92
BANK13_01_N  (via drill 0.25)
  Top 0.152: v93.34,38.73 LED7.A
  Route15 0.152: v97.16,38.73 v93.34,38.73
  Bottom 0.152: ZED1.90 66.45,9.44 arc45 66.38,9.62 66.27,9.73 arc-45 66.19,9.91 66.19,10.16 arc-90 66.67,10.64 76.63,10.64 arc45 77.08,10.83 78.24,11.98 arc-45 78.69,12.17 93.4,12.17 arc45 93.85,12.35 98.39,16.9 arc45 98.58,17.34 98.58,28.38 arc45 98.39,28.82 94.95,32.26 arc-45 94.77,32.71 94.77,37.47 arc-90 95.4,38.1 97.16,38.1 | 98.42,38.1 PAD10.1 97.16,38.1 | 97.16,38.1 v97.16,38.73
BANK13_01_P  (via drill 0.25)
  Top 0.152: v93.34,41.27 LED5.A
  Route15 0.152: v97.16,41.27 v93.34,41.27
  Bottom 0.152: ZED1.88 65.65,9.44 arc-45 65.73,9.62 65.81,9.71 arc45 65.89,9.89 65.89,10.16 arc-90 66.67,10.95 76.51,10.95 arc45 76.96,11.13 78.11,12.29 arc-45 78.56,12.47 93.27,12.47 arc45 93.72,12.66 98.09,17.02 arc45 98.27,17.47 98.27,28.25 arc45 98.09,28.7 94.65,32.14 arc-45 94.46,32.59 94.46,40 arc-90 95.1,40.64 97.16,40.64 | 98.42,40.64 PAD9.1 97.16,40.64 | 97.16,40.64 v97.16,41.27
BANK13_02_N  (via drill 0.25)
  Top 0.152: v68.05,2.92 67.92,3.06 arc-45 67.8,3.33 67.8,5.73 arc-45 67.99,6.18 69.09,7.28 arc-45 69.54,7.47 74.56,7.47 arc-90 RN3.8
  Bottom 0.152: ZED1.93 v68.05,2.92
BANK13_02_P  (via drill 0.25)
  Top 0.152: v67.25,2.92 67.39,3.06 arc45 67.5,3.33 67.5,5.86 arc-45 67.69,6.31 68.97,7.59 arc-45 69.41,7.77 75.16,7.77 arc-90 75.8,7.14 RN3.7
  Bottom 0.152: ZED1.91 v67.25,2.92
BANK13_04_N  (via drill 0.25)
  Top 0.152: v68.85,50.28 68.6,50.03 arc90 68.96,49.68 75.24,49.68 arc45 75.69,49.87 77.86,52.04 arc-45 78.3,52.22 82.98,52.22 arc-45 83.43,52.04 86.24,49.23 arc45 86.69,49.05 92.51,49.05 arc-45 92.96,48.86 94.58,47.24 arc-45 94.77,46.79 94.77,41.27 arc90 95.4,40.64 97.16,40.64 | 97.16,40.64 PAD3.1 98.42,40.64 | 97.16,40.64 v97.16,40 | v93.34,40 LED6.A
  Route2 0.152: v97.16,40 v93.34,40
  Bottom 0.152: ZED1.195 v68.85,50.28
BANK13_04_P  (via drill 0.25)
  Top 0.152: v68.05,50.28 68.3,50.03 arc90 68.96,49.38 75.36,49.38 arc45 75.81,49.56 77.98,51.73 arc-45 78.43,51.92 82.86,51.92 arc-45 83.31,51.73 86.11,48.93 arc45 86.56,48.74 92.38,48.74 arc-45 92.83,48.56 94.28,47.11 arc-45 94.46,46.66 94.46,38.73 arc90 95.1,38.1 97.16,38.1 | 97.16,38.1 PAD4.1 98.42,38.1 | 97.16,38.1 v97.16,37.47 | v93.34,37.47 LED8.A
  Route2 0.152: v97.16,37.47 v93.34,37.47
  Bottom 0.152: ZED1.193 v68.05,50.28
BANK13_05_N  (via drill 0.25)
  Top 0.152: v68.85,54.23 68.72,54.09 arc45 68.6,53.82 68.6,53.16 arc45 68.79,52.71 69.09,52.41 arc45 69.54,52.22 75.24,52.22 arc45 75.69,52.41 76.59,53.31 arc-45 77.03,53.49 83.62,53.49 arc-45 84.07,53.31 86.87,50.5 arc45 87.32,50.32 93.14,50.32 arc-45 93.59,50.13 95.85,47.87 arc-45 96.04,47.42 96.04,46.36 arc90 96.67,45.72 97.16,45.72 | 97.16,45.72 PAD1.1 | 97.16,45.72 v97.16,45.09 | v93.34,45.09 LED2.A
  Route2 0.152: v97.16,45.09 v93.34,45.09
  Bottom 0.152: ZED1.196 v68.85,54.23
BANK13_05_P  (via drill 0.25)
  Top 0.152: v68.05,54.23 68.19,54.09 arc-45 68.3,53.82 68.3,53.03 arc45 68.49,52.58 68.97,52.1 arc45 69.41,51.92 75.36,51.92 arc45 75.81,52.1 76.71,53 arc-45 77.16,53.19 83.49,53.19 arc-45 83.94,53 86.75,50.2 arc45 87.19,50.01 93.02,50.01 arc-45 93.47,49.83 95.55,47.75 arc-45 95.73,47.3 95.73,43.81 arc90 96.37,43.18 97.16,43.18 | 97.16,43.18 PAD2.1 | 97.16,43.18 v97.16,42.55 | v93.34,42.55 LED4.A
  Route2 0.152: v97.16,42.55 v93.34,42.55
  Bottom 0.152: ZED1.194 v68.05,54.23
BANK13_06_N  (via drill 0.25)
  Top 0.152: v93.34,46.36 LED1.A
  Route15 0.152: v97.16,46.36 v93.34,46.36
  Bottom 0.152: ZED1.199 70.45,47.71 arc-45 70.38,47.53 70.28,47.43 arc45 70.2,47.25 70.2,46.79 arc90 70.48,46.51 73.33,46.51 arc45 73.78,46.69 78.49,51.4 arc-45 78.94,51.59 85.53,51.59 arc-45 85.97,51.4 86.87,50.5 arc45 87.32,50.32 93.14,50.32 arc-45 93.59,50.13 95.85,47.87 arc-45 96.04,47.42 96.04,46.36 arc90 96.67,45.72 97.16,45.72 | 98.42,45.72 PAD7.1 97.16,45.72 | 97.16,45.72 v97.16,46.36
BANK13_06_P  (via drill 0.25)
  Top 0.152: v93.34,43.81 LED3.A
  Route15 0.152: v97.16,43.81 v93.34,43.81
  Bottom 0.152: ZED1.197 69.65,48.11 69.65,47.71 arc45 69.72,47.53 69.83,47.43 arc-45 69.9,47.25 69.9,46.79 arc90 70.48,46.2 73.46,46.2 arc45 73.91,46.39 78.62,51.1 arc-45 79.07,51.28 85.4,51.28 arc-45 85.85,51.1 86.75,50.2 arc45 87.19,50.01 93.02,50.01 arc-45 93.47,49.83 95.55,47.75 arc-45 95.73,47.3 95.73,43.81 arc90 96.37,43.18 97.16,43.18 | 98.42,43.18 PAD8.1 97.16,43.18 | 97.16,43.18 v97.16,43.81
E_EN  (via drill 0.25)
  Top 0.203: X-EAST.13 70.73,39.33 arc45 71.18,39.51 v71.25,39.58
  Bottom 0.203: v71.25,39.58 71.56,39.89 arc-45 72.01,40.08 78.66,40.08 arc-45 79.11,39.89 79.44,39.56 arc45 79.89,39.37 82.29,39.37 arc-45 82.74,39.18 JP7.7
E_I2C_V
  Top 0.203: 74.68,39.83 X-EAST.12 77.47,39.83 | 74.55,39.33 X-EAST.14 77.47,39.33 | 74.68,39.4 74.68,39.83 | 74.55,39.33 74.55,39.83 | 74.55,39.33 74.42,39.33 74.42,39.83 74.55,39.83 | 74.55,39.83 74.68,39.83 | 77.47,39.33 77.6,39.33 | 77.47,39.83 77.6,39.83 | 77.73,39.83 77.73,39.33 77.6,39.33 | 77.6,39.83 77.6,39.33 | 77.73,39.83 77.6,39.83 | 77.47,39.83 77.47,39.33 | 77.67,39.58 77.67,39.77 77.73,39.83
  Top 0.406: 77.67,39.58 79.54,39.58 arc-45 79.99,39.39 JP7.8
E_SCK  (via drill 0.25)
  Top 0.203: X-EAST.11 69.22,39.83 arc-45 68.78,40.01 v68.71,40.08
  Bottom 0.203: v68.71,40.08 69.02,40.39 arc-45 69.47,40.58 78.03,40.58 arc45 78.48,40.76 79.44,41.72 arc-45 79.89,41.91 82.29,41.91 arc-45 82.74,41.72 JP7.9
E_SCL
  Top 0.203: X-EAST.16 78.39,38.83 arc-45 78.84,38.64 81.09,36.38 arc-45 81.28,35.93 JP7.6
E_SDA
  Top 0.203: X-EAST.18 78.38,38.33 arc-45 78.83,38.14 79.82,37.14 arc-45 80.01,36.69 80.01,34.55 arc45 80.2,34.1 JP7.4
E_SDI  (via drill 0.25)
  Top 0.203: X-EAST.15 v71.25,38.83
  Bottom 0.203: v71.25,38.83 71.81,39.39 arc-45 72.26,39.58 77.13,39.58 arc-45 77.58,39.39 79.95,37.02 arc45 80.4,36.83 82.29,36.83 arc-45 82.74,36.64 JP7.5
E_SDI_V
  Top 0.203: 74.68,37.83 X-EAST.20 77.47,37.83 | 74.55,37.33 X-EAST.22 77.47,37.33 | 74.68,37.4 74.68,37.83 | 74.55,37.33 74.55,37.83 | 74.55,37.33 74.42,37.33 74.42,37.83 74.55,37.83 | 74.55,37.83 74.68,37.83 | 77.47,37.33 77.6,37.33 | 77.47,37.83 77.6,37.83 | 77.73,37.83 77.73,37.33 77.61,37.33 77.6,37.33 | 77.6,37.83 77.6,37.33 | 77.73,37.83 77.6,37.83 | 77.47,37.83 77.47,37.33 | 77.73,37.58 77.73,37.82 77.73,37.83
  Top 0.406: JP7.2 79.31,32.45 arc-45 79.12,32.9 79.12,35.55 arc45 78.94,36 77.61,37.33
E_SDO  (via drill 0.25)
  Top 0.203: X-EAST.17 71.24,38.33 arc45 71.69,38.51 v72.01,38.83
  Bottom 0.203: v72.01,38.83 72.06,38.89 arc-45 72.51,39.08 75.6,39.08 arc-45 76.05,38.89 80.46,34.48 arc45 80.91,34.29 82.29,34.29 arc-45 82.74,34.1 JP7.3
E_VE  (via drill 0.25)
  Top 0.203: X-EAST.83 71.37,18.82 | 71.37,18.82 71.37,18.32 | 71.37,18.32 71.37,17.7 | X-EAST.85 71.37,18.32 | 71.63,17.7 71.63,18.82 71.37,18.82 | 71.63,17.7 v71.5,17.82 | 71.37,17.7 v71.5,17.82 | v71.5,17.82 71.5,18.8 | 74.68,19.82 X-EAST.80 77.47,19.82 | 74.68,19.32 74.68,18.82 | 74.68,18.82 74.68,18.06 | 74.68,19.32 X-EAST.82 77.47,19.32 | 74.68,19.32 74.68,19.82 | 74.42,18.06 74.42,19.82 74.55,19.82 | v74.55,18.19 74.55,19.82 | 74.68,18.06 v74.55,18.19 | v74.55,18.19 74.42,18.06 | 74.68,19.82 74.55,19.82 | 77.47,19.82 77.47,19.32 | 77.47,19.32 77.47,18.82 | 77.47,18.82 X-EAST.84 74.68,18.82 | 77.47,19.82 77.73,19.82 77.73,18.82 77.6,18.82 | 77.47,18.82 77.6,18.82 | 77.6,18.82 77.6,19.8 | 74.68,18.06 74.42,18.06 | 71.37,17.7 71.63,17.7 | X-EAST.87 v71.5,17.82
  Top 0.762: v83,4.45 PH-S.5
  Route15 0.152: 83,5.24 v83,5.08
  Route15 0.61: 74.21,17.82 74.55,18.16 v74.55,18.19
  Route15 0.762: v71.5,17.82 74.21,17.82 75.89,17.82 arc-45 76.34,17.64 82.81,11.17 arc-45 83,10.72 83,5.24 82.99,5.24 v82.99,4.45
  Bottom 0.762: v83,4.45 v83,5.08 v83,5.71 83,7.01 C15.1
E_VE_CV  (via drill 0.25)
  Top 0.152: X-EAST.89 68.96,17.32 v68.71,17.07 | FPC-S.17 v94.97,21.95
  Bottom 0.152: v68.71,17.07 70.27,15.51 arc45 70.72,15.32 88.09,15.32 arc45 88.54,15.51 v94.97,21.95
E_VE_OV
  Top 0.152: X-EAST.94 94.44,15.32 arc45 94.89,15.51 95.62,16.25 arc-45 96.07,16.43 FPC-S.6
E_VE_UV
  Top 0.152: X-EAST.92 94.3,15.82 arc45 94.75,16.01 95.5,16.76 arc-45 95.94,16.94 FPC-S.7
EE_CLK1
  Bottom 0.152: 1.47,13.5 U2.4 1.47,13.39 arc45 1.66,12.95 1.72,12.89 arc45 2.17,12.7 4.65,12.7 arc45 4.74,12.74 4.78,12.78 arc-45 4.87,12.81 U1.44
  Bottom 0.203: U2.4 1.47,15.05 R4.1
EE_CS1
  Bottom 0.152: U1.45 5.01,13.31 arc45 4.56,13.13 arc-45 4.27,13 2.93,13 arc-45 2.48,13.19 arc-45 2.41,13.35 U2.5
  Bottom 0.203: U2.5 R3.1
EE_DATA1
  Bottom 0.152: U1.43 4.83,12.31 arc-45 4.74,12.35 4.74,12.36 arc45 4.65,12.39 1.68,12.39 1.47,12.19 U2.3 1.47,10.86 arc45 1.66,10.41 arc-45 1.84,9.98 R6.2
FTDI_D_N  (via drill 0.25)
  Top 0.254: U3.2 4.13,23.82 arc-45 3.94,23.37 arc-45 3.59,23.23 v2.92,23.23
  Bottom 0.152: U1.6 10.29,16.99 arc-45 10.33,17.09 10.35,17.11 arc45 10.39,17.2 10.39,21.59 arc90 8.32,23.66 5.26,23.66 arc45 5.17,23.62 5.06,23.52 arc-45 4.97,23.48 USB.2
  Bottom 0.203: v2.92,23.23 3.06,23.37 arc-45 3.33,23.48 USB.2
FTDI_D_P  (via drill 0.25)
  Top 0.254: U3.1 3.29,24.28 arc45 v2.92,24.13
  Bottom 0.152: U1.7 10.79,16.99 arc45 10.75,17.09 10.73,17.11 arc-45 10.69,17.2 10.69,21.59 arc90 8.32,23.96 5.26,23.96 arc-45 5.17,24 5.08,24.09 arc45 4.99,24.13 USB.3
  Bottom 0.203: v2.92,24.13 USB.3
FTDI_TCK  (via drill 0.25)
  Top 0.152: v31.25,2.92 31.25,3.41 arc45 31.06,3.86 30.67,4.26 arc45 30.22,4.45 17.15,4.45 arc-45 16.7,4.63 12.76,8.58 arc-45 12.57,9.03 12.57,11.86 arc45 12.52,11.99 arc-45 12.45,12.17 12.45,13.28 arc-45 12.63,13.73 13.72,14.81 v13.84,14.81
  Bottom 0.152: ZED1.1 31.25,4.45 v31.25,2.92 | U1.13 v13.84,14.81
FTDI_TDI  (via drill 0.25)
  Top 0.152: v32.05,6.98 31.6,7.43 arc45 31.15,7.62 30.49,7.62 arc-45 30.04,7.81 29.78,8.07 arc45 29.33,8.25 27.95,8.25 arc45 27.5,8.07 25.97,6.54 arc-45 25.52,6.35 17.92,6.35 arc-45 17.47,6.54 14.66,9.34 arc-45 14.48,9.79 14.48,12.21 arc-45 14.55,12.39 arc45 14.6,12.52 14.6,13.21 15.46,14.06 v15.75,14.31
  Bottom 0.152: ZED1.4 v32.05,6.98 | U1.14 v15.75,14.31
FTDI_TDO  (via drill 0.25)
  Top 0.152: v32.05,5.71 31.6,5.27 arc-45 31.15,5.08 17.41,5.08 arc-45 16.96,5.27 13.39,8.83 arc-45 13.21,9.28 13.21,12.22 arc45 13.15,12.34 arc-45 13.08,12.52 13.08,12.92 arc-45 13.27,13.37 13.63,13.72 arc-45 v13.84,13.81
  Bottom 0.152: ZED1.3 v32.05,5.71 | U1.15 v13.84,13.81
FTDI_TMS  (via drill 0.25)
  Top 0.152: v31.25,6.35 30.73,6.86 arc45 30.43,6.98 30.23,6.98 arc-45 29.79,7.17 29.52,7.43 arc45 29.07,7.62 28.2,7.62 arc45 27.75,7.43 26.22,5.9 arc-45 25.77,5.71 17.66,5.71 arc-45 17.21,5.9 14.03,9.09 arc-45 13.84,9.53 v13.84,12.81
  Bottom 0.152: ZED1.2 v31.25,6.35 | U1.16 14.06,13.31 13.84,13.1 v13.84,12.81
GND  (via drill 0.25, 3)
  Top 0.254: v5.33,25.43 5.33,25.03 arc-45 5.15,24.58 5,24.43 arc-45 U3.3
  Bottom 0.152: U2.2 2.41,10.72 arc-45 v2.29,10.41
  other vias: 29.84,48.89 29.84,52.7 71.75,48.89 71.75,52.7 29.84,50.8 71.75,50.8 29.84,6.35 71.75,6.35 71.75,8.25 71.75,4.45 29.84,3.81 29.84,8.89 97.16,44.45 97.16,41.91 97.16,46.99 97.16,39.37 97.16,36.83 97.16,35.56 97.16,34.29 97.16,31.75 98.42,44.45 98.42,46.99 98.42,41.91 98.42,39.37 98.42,36.83 98.42,34.29 98.42,31.75 34.61,31.75 35.88,33.02 33.97,33.02 35.24,34.29 36.51,35.56 37.78,36.83 39.05,38.1 37.15,34.29 38.42,35.56 39.69,36.83 37.15,38.1 35.88,36.83 34.61,35.56 33.34,34.29 35.24,30.48 36.51,31.75 37.78,33.02 39.05,34.29 40.32,35.56 41.59,36.83 42.86,38.1 44.13,39.37 45.4,40.64 46.67,41.91 47.94,43.18 49.21,44.45 50.48,45.72 48.58,45.72 47.31,44.45 46.04,43.18 44.77,41.91 43.5,40.64 33.97,29.21 33.97,36.83 35.24,38.1 36.51,39.37 37.46,40.32 38.73,39.69 40,39.05 41.27,38.42 37.46,42.23 38.73,41.59 40,40.96 41.27,40.32 41.27,42.23 40,42.86 38.73,43.5 37.46,44.13 37.46,46.04 38.73,45.4 39.69,46.36 41.27,46.04 41.27,44.13 42.23,45.09 43.5,46.36 43.18,44.13 44.45,45.4 42.54,41.59 42.54,43.5 43.81,42.86 45.08,44.13 46.35,45.4 46.99,46.67 46.04,46.67 48.89,46.67 50.8,46.67 34.61,39.37 35.88,40.64 33.34,38.1 33.97,40.64 35.24,41.91 36.19,42.86 42.54,39.69 36.19,44.77 36.19,46.67 33.66,30.8 33.97,27.94 35.24,26.67 36.51,25.4 37.78,24.13 39.05,22.86 40.32,21.59 41.59,20.32 42.86,19.05 44.13,17.78 45.4,16.51 46.67,15.24 47.94,13.97 34.61,25.4 35.88,24.13 37.15,22.86 38.42,21.59 39.69,20.32 40.96,19.05 43.5,16.51 44.77,15.24 46.04,13.97 46.99,13.02 42.86,15.24 44.13,13.97 41.27,14.6 41.27,13.33 38.73,14.6 38.73,13.33 37.46,14.6 37.46,13.33 37.46,12.06 39.05,19.05 38.42,17.78 37.15,19.05 35.88,20.32 34.61,21.59 33.34,22.86 37.78,20.32 36.51,21.59 35.24,22.86 33.97,24.13 33.66,26.35 36.51,17.78 35.24,19.05 33.97,20.32 35.88,16.51 34.61,17.78 33.34,19.05 33.97,16.51 34.92,15.56 34.92,14.6 34.92,13.33 34.92,12.06 34.92,10.48 36.19,10.48 36.19,12.06 36.19,13.33 36.19,14.6 40,10.48 41.91,10.48 43.81,10.48 38.73,12.06 41.27,16.83 40,16.19 40,18.1 38.73,15.56 42.54,17.46 44.13,12.06 46.99,12.06 46.99,10.48 45.72,10.48 45.72,12.06 48.26,10.48 48.26,12.06 49.21,12.7 50.48,11.43 51.12,11.43 52.39,12.7 53.66,13.97 54.93,15.24 56.2,16.51 57.47,17.78 58.74,19.05 60.01,20.32 61.28,21.59 62.55,22.86 63.82,24.13 65.09,25.4 66.36,26.67 67.63,27.94 67.63,29.21 66.36,30.48 65.09,31.75 63.82,33.02 62.55,34.29 61.28,35.56 60.01,36.83 58.74,38.1 57.47,39.37 56.2,40.64 54.93,41.91 53.66,43.18 52.39,44.45 51.12,45.72 54.29,44.45 55.56,43.18 56.83,41.91 58.1,40.64 60.64,38.1 61.91,36.83 63.82,36.83 65.72,36.83 67.63,36.83 63.18,35.56 65.09,35.56 66.99,35.56 64.45,34.29 66.36,34.29 68.26,34.29 65.72,33.02 67.63,33.02 66.99,31.75 68.26,30.8 68.26,32.38 62.55,38.1 64.45,38.1 66.36,38.1 68.26,38.1 63.18,39.37 65.09,39.37 66.99,39.37 65.72,40.64 58.74,41.91 65.41,41.91 37.46,16.83 40,13.33 40,14.29 40,12.38 42.86,13.33 36.85,6.35 39.25,6.35 41.65,6.35 44.05,6.35 46.45,6.35 48.85,6.35 51.24,6.35 55.56,6.35 57.47,6.35 59.65,6.35 64.85,6.35 69.25,6.35 66.85,6.35 34.45,6.35 33.66,10.48 32.7,11.43 31.75,12.38 31.75,10.48 30.73,11.43 27.94,15.88 27.94,19.05 29.21,20.32 29.21,21.59 29.21,23.18 29.21,24.77 29.21,26.35 29.21,30.8 29.21,32.38 29.21,33.97 29.21,35.56 29.21,37.47 29.21,19.05 27.94,37.47 33.66,46.67 32.7,45.72 31.75,44.77 31.75,46.67 29.84,44.77 30.8,45.72 29.84,12.38 73.66,41.27 73.66,19.68 72.39,19.68 72.39,16.83 40,44.77 35.65,50.8 39.25,50.8 41.65,50.8 44.05,50.8 46.04,50.8 47.94,50.8 49.85,50.8 51.25,50.8 56.85,50.8 64.85,50.8 67.25,50.8 59.25,50.8 49.53,10.48 52.07,10.48 53.97,10.48 54.93,10.48 54.29,12.7 56.2,12.7 57.47,12.06 60.01,12.7 55.56,13.97 57.47,13.97 56.83,15.24 58.74,15.24 58.1,16.51 60.64,19.05 62.55,19.05 64.45,19.05 66.36,19.05 68.26,19.05 61.91,20.32 63.82,20.32 65.72,20.32 67.63,20.32 63.18,21.59 65.09,21.59 66.99,21.59 64.45,22.86 66.36,22.86 68.26,22.86 65.72,24.13 67.63,24.13 66.99,25.4 61.59,18.1 61.59,16.19 61.59,14.29 62.86,15.56 62.86,17.46 62.86,13.65 62.86,11.75 61.59,12.38 60.32,14.92 60.32,16.83 64.13,14.92 64.13,16.83 64.13,13.02 61.59,10.48 59.69,10.48 56.52,11.11 58.74,13.33 58.74,11.43 64.13,11.11 65.41,12.38 65.41,10.48 65.41,14.29 66.67,15.56 67.94,16.83 65.41,16.19 66.67,17.46 65.41,18.1 68.26,26.35 65.41,43.18 65.41,44.77 65.41,46.67 64.13,43.18 64.13,44.77 62.86,44.77 62.86,43.18 62.86,41.91 64.13,40.32 61.59,40.96 61.59,43.18 60.32,40.32 59.69,44.77 57.15,47.31 56.52,44.45 57.47,43.18 58.74,45.72 59.69,46.67 61.59,46.67 61.59,44.77 60.32,43.18 56.52,45.72 54.93,45.72 54.93,46.67 53.34,46.67 53.34,45.72 66.67,46.67 66.67,44.77 66.67,43.18 66.67,41.91 67.63,40.64 72.39,23.18 72.39,21.59 72.39,24.77 72.39,26.35 72.39,30.8 72.39,33.97 72.39,35.56 72.39,36.83 72.39,32.38 73.66,36.83 78.1,44.77 79.69,38.73 79.69,40.64 78.1,42.23 23.49,14.92 23.49,12.38 21.91,16.51 21.91,18.41 23.49,10.48 78.1,46.67 22.86,20 78.74,37.15 87,5.08 87,3.18 14.6,52.07 14.6,53.97 99.69,15.24 99.69,24.13 99.69,19.68 1.9,33.02 1.9,37.47 58.05,1.27 60.45,1.27 55.65,1.27 58.05,55.88 55.65,55.88 60.45,55.88 3.81,53.34 97.79,53.34 97.79,3.81 3.81,3.81 64.13,46.04 39.25,55.25 36.85,55.25 41.65,55.25 44.05,55.25 46.45,55.25 48.85,55.25 51.25,55.25 64.85,55.25 67.25,55.25 36.85,1.9 39.25,1.9 41.65,1.9 44.05,1.9 46.45,1.9 48.85,1.9 51.25,1.9 64.85,1.9 68.85,1.9 34.45,1.9 56.85,55.25 59.25,55.25 59.25,1.9 56.85,1.9
  pour Top (rank 3): 0,57.15 101.6,57.15 101.6,0 0,0
  pour Bottom (rank 3): 0,57.15 101.6,57.15 101.6,0 0,0
  pour Route2 (rank 3): 0,57.15 101.6,57.15 101.6,0 0,0
  pour Route15 (rank 3): 0,57.15 101.6,57.15 101.6,0 0,0
JTAG_V
  Top 0.203: 26.92,19.32 X-WEST.20 24.55,19.32 | 27.05,19.82 X-WEST.22 24.18,19.82 | 26.92,19.75 26.92,19.32 | 27.05,19.82 27.05,19.32 | 27.05,19.82 27.18,19.82 27.18,19.32 27.05,19.32 | 27.05,19.32 26.92,19.32 | 25.07,19.32 24.05,19.32 | 24.18,19.4 24.18,19.82 | 23.92,19.57 23.92,19.82 24.05,19.82 | 24.05,19.32 24.05,19.77 24.05,19.82 | 24.05,19.32 23.92,19.32 23.92,19.57 | 24.05,19.82 24.18,19.82 | 23.92,19.57
  Top 0.406: JP5.2 22.29,24.7 arc-45 22.48,24.25 22.48,21.6 arc45 22.66,21.15 24.05,19.77
JX1_00_N  (via drill 0.25)
  Top 0.152: v36.05,2.92 35.92,3.06 arc-45 35.8,3.33 35.8,7.33 arc45 35.62,7.78 28.91,14.48 arc-45 28.73,14.93 28.73,20.57 arc90 28.07,21.23 26.83,21.23 arc-45 26.78,21.25 arc45 26.6,21.32 X-WEST.28
  Bottom 0.152: ZED1.13 v36.05,2.92
JX1_00_P  (via drill 0.25)
  Top 0.152: v35.25,2.92 35.39,3.06 arc45 35.5,3.33 35.5,7.2 arc45 35.31,7.65 28.61,14.36 arc-45 28.42,14.8 28.42,20.57 arc90 28.07,20.92 26.83,20.92 arc45 26.78,20.9 arc-45 26.6,20.82 X-WEST.26
  Bottom 0.152: ZED1.11 v35.25,2.92
JX1_01_N
  Bottom 0.152: ZED1.14 36.05,9.44 arc45 35.98,9.62 35.79,9.81 arc-45 35.71,9.99 35.71,15.67 arc45 35.53,16.12 32,19.65 arc45 31.55,19.84 26.36,19.84 arc-45 25.91,20.02 22.56,23.37 arc-45 22.38,23.82 22.38,29.64 arc45 22.19,30.09 21.84,30.45 arc45 21.39,30.63 20.95,30.63 arc-45 20.69,30.74 20.51,30.93 arc-45 20.32,31.38 JP6.12
JX1_01_P
  Bottom 0.152: ZED1.12 35.25,9.44 arc-45 35.33,9.62 35.33,9.63 arc45 35.41,9.81 35.41,15.55 arc45 35.22,16 31.87,19.35 arc45 31.42,19.53 26.23,19.53 arc-45 25.79,19.72 22.26,23.25 arc-45 22.07,23.7 22.07,29.52 arc45 21.89,29.97 21.71,30.14 arc45 21.26,30.33 20.95,30.33 arc45 20.69,30.22 20.51,30.03 arc45 20.32,29.58 JP6.11
JX1_02_N  (via drill 0.25)
  Top 0.152: v38.45,2.92 38.32,3.06 arc-45 38.2,3.33 38.2,9.37 arc45 38.02,9.82 37.17,10.67 arc-45 36.98,11.12 36.98,16.31 arc45 36.8,16.76 33.51,20.04 arc45 33.06,20.23 32.83,20.23 arc-45 32.78,20.25 arc45 32.6,20.32 X-WEST.23
  Bottom 0.152: ZED1.19 v38.45,2.92
JX1_02_P  (via drill 0.25)
  Top 0.152: v37.65,2.92 37.79,3.06 arc45 37.9,3.33 37.9,9.25 arc45 37.71,9.7 36.86,10.55 arc-45 36.68,11 36.68,16.18 arc45 36.49,16.63 33.39,19.74 arc45 32.94,19.92 32.83,19.92 arc45 32.78,19.9 arc-45 32.6,19.82 X-WEST.21
  Bottom 0.152: ZED1.17 v37.65,2.92
JX1_03_N
  Bottom 0.152: ZED1.20 38.45,9.44 arc45 38.38,9.62 38.33,9.67 arc-45 38.25,9.85 38.25,15.04 arc45 38.07,15.49 32.63,20.92 arc45 32.19,21.11 27,21.11 arc-45 26.55,21.29 24.79,23.05 arc-45 24.6,23.5 24.6,33.77 arc45 24.41,34.22 23.74,34.89 arc45 23.29,35.08 20.27,35.08 arc45 19.82,34.89 18.83,33.9 arc45 18.64,33.45 18.64,32.88 arc-45 18.46,32.43 JP6.10
JX1_03_P
  Bottom 0.152: ZED1.18 37.65,9.44 arc-45 37.73,9.62 37.87,9.77 arc45 37.95,9.95 37.95,14.91 arc45 37.76,15.36 32.51,20.62 arc45 32.06,20.8 26.87,20.8 arc-45 26.42,20.99 24.48,22.93 arc-45 24.29,23.38 24.29,33.65 arc45 24.11,34.09 23.62,34.59 arc45 23.17,34.77 20.39,34.77 arc45 19.94,34.59 19.13,33.78 arc45 18.95,33.33 18.95,30.64 arc-45 18.76,30.19 JP6.9
JX1_04_N  (via drill 0.25)
  Top 0.152: v40.85,2.92 40.72,3.06 arc-45 40.6,3.33 40.6,8.88 arc45 40.42,9.33 38.44,11.31 arc-45 38.25,11.76 38.25,16.95 arc45 38.07,17.39 33.92,21.54 arc45 33.47,21.73 32.83,21.73 arc-45 32.78,21.75 arc45 32.6,21.82 X-WEST.29
  Bottom 0.152: ZED1.25 v40.85,2.92
JX1_04_P  (via drill 0.25)
  Top 0.152: v40.05,2.92 40.19,3.06 arc45 40.3,3.33 40.3,8.75 arc45 40.11,9.2 38.13,11.18 arc-45 37.95,11.63 37.95,16.82 arc45 37.76,17.27 33.79,21.24 arc45 33.34,21.42 32.83,21.42 arc45 32.78,21.4 arc-45 32.6,21.32 X-WEST.27
  Bottom 0.152: ZED1.23 v40.05,2.92
JX1_05_N
  Bottom 0.152: ZED1.26 40.85,9.51 arc45 40.83,9.57 arc-45 40.79,9.66 40.79,14.4 arc45 40.61,14.85 33.27,22.19 arc45 32.82,22.38 27.63,22.38 arc-45 27.18,22.56 26.12,23.63 arc-45 25.93,24.07 25.93,34.34 arc45 25.75,34.79 24.38,36.16 arc45 23.93,36.35 17.73,36.35 arc45 17.28,36.16 16.29,35.17 arc45 16.1,34.73 16.1,32.88 arc-45 15.92,32.43 JP6.8
JX1_05_P
  Bottom 0.152: ZED1.24 40.05,9.44 arc-45 40.13,9.62 40.41,9.91 arc45 40.49,10.09 40.49,14.28 arc45 40.3,14.73 33.14,21.89 arc45 32.69,22.07 27.5,22.07 arc-45 27.06,22.26 25.81,23.5 arc-45 25.63,23.95 25.63,34.22 arc45 25.44,34.67 24.25,35.86 arc45 23.8,36.04 17.85,36.04 arc45 17.4,35.86 16.59,35.05 arc45 16.41,34.6 16.41,30.64 arc-45 16.22,30.19 JP6.7
JX1_06_N  (via drill 0.25)
  Top 0.152: v43.25,2.92 43.12,3.06 arc-45 43,3.33 43,8.38 arc45 42.82,8.83 39.71,11.94 arc-45 39.52,12.39 39.52,17.58 arc45 39.34,18.03 33.32,24.04 arc45 32.88,24.23 32.83,24.23 arc-45 32.78,24.25 arc45 32.6,24.32 X-WEST.35
  Bottom 0.152: ZED1.31 v43.25,2.92
JX1_06_P  (via drill 0.25)
  Top 0.152: v42.45,2.92 42.59,3.06 arc45 42.7,3.33 42.7,8.26 arc45 42.51,8.7 39.4,11.82 arc-45 39.22,12.27 39.22,17.45 arc45 39.03,17.9 33.16,23.77 arc45 32.8,23.92 32.78,23.9 arc-45 32.6,23.82 X-WEST.33
  Bottom 0.152: ZED1.29 v42.45,2.92
JX1_07_N  (via drill 0.25)
  Top 0.152: X-WEST.36 v26.7,24.32
  Bottom 0.152: ZED1.32 43.25,9.44 arc45 43.18,9.62 43.09,9.71 arc-45 43.02,9.89 43.02,12.18 arc45 42.83,12.63 42.25,13.21 arc-45 42.06,13.66 42.06,15.04 arc45 41.88,15.49 33.32,24.04 arc45 32.88,24.23 27.52,24.23 27.42,24.32 v26.7,24.32
JX1_07_P  (via drill 0.25)
  Top 0.152: X-WEST.34 v27.26,23.82
  Bottom 0.152: ZED1.30 42.45,9.44 arc-45 42.53,9.62 42.64,9.73 arc45 42.71,9.91 42.71,12.06 arc45 42.52,12.5 41.94,13.09 arc-45 41.76,13.54 41.76,14.91 arc45 41.57,15.36 33.2,23.74 arc45 32.75,23.92 27.35,23.92 v27.26,23.82
JX1_08_N  (via drill 0.25)
  Top 0.152: v45.65,2.92 45.52,3.06 arc-45 45.41,3.33 45.41,7.89 arc45 45.22,8.34 40.98,12.58 arc-45 40.79,13.03 40.79,18.21 arc45 40.61,18.66 33.73,25.54 arc45 33.28,25.73 32.83,25.73 arc-45 32.78,25.75 arc45 32.6,25.82 X-WEST.41
  Bottom 0.152: ZED1.37 v45.65,2.92
JX1_08_P  (via drill 0.25)
  Top 0.152: v44.85,2.92 44.99,3.06 arc45 45.1,3.33 45.1,7.76 arc45 44.91,8.21 40.67,12.45 arc-45 40.49,12.9 40.49,18.09 arc45 40.3,18.54 33.6,25.24 arc45 33.15,25.42 32.83,25.42 arc45 32.78,25.4 arc-45 32.6,25.32 X-WEST.39
  Bottom 0.152: ZED1.35 v44.85,2.92
JX1_09_N  (via drill 0.25)
  Top 0.152: X-WEST.42 v26.7,25.82
  Bottom 0.152: ZED1.38 45.65,9.44 arc45 45.58,9.62 45.31,9.89 arc-45 45.24,10.07 45.24,13.77 arc45 45.05,14.22 33.73,25.54 arc45 33.28,25.73 27.52,25.73 27.42,25.82 v26.7,25.82
JX1_09_P  (via drill 0.25)
  Top 0.152: X-WEST.40 v27.26,25.32
  Bottom 0.152: ZED1.36 44.85,9.49 arc-45 44.89,9.58 44.89,9.59 arc45 44.93,9.68 44.93,13.64 arc45 44.75,14.09 33.6,25.24 arc45 33.15,25.42 27.35,25.42 v27.26,25.32
JX1_10_N  (via drill 0.25)
  Top 0.152: v48.05,2.92 47.92,3.06 arc-45 47.8,3.33 47.8,7.39 arc45 47.62,7.84 42.25,13.21 arc-45 42.06,13.66 42.06,18.85 arc45 41.88,19.3 34.13,27.04 arc45 33.69,27.23 32.83,27.23 arc-45 32.78,27.25 arc45 32.6,27.32 X-WEST.47
  Bottom 0.152: ZED1.43 v48.05,2.92
JX1_10_P  (via drill 0.25)
  Top 0.152: v47.25,2.92 47.39,3.06 arc45 47.5,3.33 47.5,7.27 arc45 47.31,7.71 41.94,13.09 arc-45 41.76,13.54 41.76,18.72 arc45 41.57,19.17 34.01,26.74 arc45 33.56,26.92 32.83,26.92 arc45 32.78,26.9 arc-45 32.6,26.82 X-WEST.45
  Bottom 0.152: ZED1.41 v47.25,2.92
JX1_11_N  (via drill 0.25)
  Top 0.152: X-WEST.48 v26.7,27.32
  Bottom 0.152: ZED1.44 48.05,9.44 arc45 47.98,9.62 47.85,9.75 arc-45 47.78,9.93 47.78,13.13 arc45 47.59,13.58 34.13,27.04 arc45 33.69,27.23 27.52,27.23 27.42,27.32 v26.7,27.32
JX1_11_P  (via drill 0.25)
  Top 0.152: X-WEST.46 v27.26,26.82
  Bottom 0.152: ZED1.42 47.25,9.44 arc-45 47.33,9.62 47.4,9.69 arc45 47.47,9.87 47.47,13.01 arc45 47.29,13.46 34.01,26.74 arc45 33.56,26.92 27.35,26.92 v27.26,26.82
JX1_12_N  (via drill 0.25)
  Top 0.152: v50.45,2.92 50.32,3.06 arc-45 50.2,3.33 50.2,3.37 arc-45 50.39,3.82 59.66,13.09 arc45 59.84,13.54 59.84,18.72 arc-45 60.03,19.17 67.59,26.74 arc-45 68.04,26.92 68.77,26.92 arc-45 68.82,26.9 arc45 69,26.82 X-EAST.55
  Bottom 0.152: ZED1.49 v50.45,2.92
JX1_12_P  (via drill 0.25)
  Top 0.152: v49.65,2.92 49.79,3.06 arc45 49.9,3.33 49.9,3.5 arc-45 50.09,3.95 59.35,13.21 arc45 59.54,13.66 59.54,18.85 arc-45 59.72,19.3 67.47,27.04 arc-45 67.91,27.23 68.77,27.23 arc45 68.82,27.25 arc-45 69,27.32 X-EAST.53
  Bottom 0.152: ZED1.47 v49.65,2.92
JX1_13_N  (via drill 0.25)
  Top 0.152: X-EAST.56 v74.47,26.82
  Bottom 0.152: ZED1.50 50.45,9.44 arc45 50.38,9.62 50.2,9.79 arc-45 50.34,10.12 50.68,10.46 arc-45 51.13,10.64 51.23,10.64 arc45 51.68,10.83 67.59,26.74 arc-45 68.04,26.92 74.37,26.92 v74.47,26.82
JX1_13_P  (via drill 0.25)
  Top 0.152: X-EAST.54 v74.9,27.32
  Bottom 0.152: ZED1.48 49.65,9.44 arc-45 49.73,9.62 49.86,9.76 arc45 49.9,9.85 arc-45 50.09,10.3 50.55,10.76 arc-45 51,10.95 51.11,10.95 arc45 51.56,11.13 67.47,27.04 arc-45 67.91,27.23 74.21,27.23 74.31,27.32 v74.9,27.32
JX1_14_N  (via drill 0.25)
  Top 0.152: v52.85,2.92 52.72,3.06 arc-45 52.6,3.33 52.6,3.87 arc-45 52.79,4.32 60.93,12.45 arc45 61.11,12.9 61.11,18.09 arc-45 61.3,18.54 68,25.24 arc-45 68.45,25.42 68.77,25.42 arc-45 68.82,25.4 arc45 69,25.32 X-EAST.61
  Bottom 0.152: ZED1.55 v52.85,2.92
JX1_14_P  (via drill 0.25)
  Top 0.152: v52.05,2.92 52.19,3.06 arc45 52.3,3.33 52.3,3.99 arc-45 52.49,4.44 60.62,12.58 arc45 60.81,13.03 60.81,18.21 arc-45 60.99,18.66 67.87,25.54 arc-45 68.32,25.73 68.77,25.73 arc45 68.82,25.75 arc-45 69,25.82 X-EAST.59
  Bottom 0.152: ZED1.53 v52.05,2.92
JX1_15_N  (via drill 0.25)
  Top 0.152: X-EAST.62 v74.47,25.32
  Bottom 0.152: ZED1.56 52.85,9.44 arc45 52.78,9.62 52.6,9.79 arc-45 52.64,9.88 68,25.24 arc-45 68.45,25.42 74.37,25.42 v74.47,25.32
JX1_15_P  (via drill 0.25)
  Top 0.152: X-EAST.60 v74.9,25.82
  Bottom 0.152: ZED1.54 52.05,9.44 arc-45 52.13,9.62 52.3,9.79 arc-45 52.43,10.1 67.87,25.54 arc-45 68.32,25.73 74.21,25.73 74.31,25.82 v74.9,25.82
JX1_16_N  (via drill 0.25)
  Top 0.152: v56.05,2.92 55.92,3.06 arc-45 55.8,3.33 55.8,5.16 arc-45 55.99,5.61 62.2,11.82 arc45 62.38,12.27 62.38,17.45 arc-45 62.57,17.9 68.44,23.77 arc-45 68.8,23.92 68.82,23.9 arc45 69,23.82 X-EAST.67
  Bottom 0.152: ZED1.63 v56.05,2.92
JX1_16_P  (via drill 0.25)
  Top 0.152: v55.25,2.92 55.39,3.06 arc45 55.5,3.33 55.5,5.29 arc-45 55.69,5.74 61.89,11.94 arc45 62.08,12.39 62.08,17.58 arc-45 62.26,18.03 68.28,24.04 arc-45 68.72,24.23 68.77,24.23 arc45 68.82,24.25 arc-45 69,24.32 X-EAST.65
  Bottom 0.152: ZED1.61 v55.25,2.92
JX1_17_N  (via drill 0.25)
  Top 0.152: X-EAST.68 v74.47,23.82
  Bottom 0.152: ZED1.64 56.05,9.44 arc45 55.98,9.62 55.88,9.72 arc-45 55.8,9.9 55.8,10.88 arc-45 55.99,11.33 68.4,23.74 arc-45 68.85,23.92 74.37,23.92 v74.47,23.82
JX1_17_P  (via drill 0.25)
  Top 0.152: X-EAST.66 v74.9,24.32
  Bottom 0.152: ZED1.62 55.25,9.44 arc-45 55.33,9.62 55.43,9.72 arc45 55.5,9.9 55.5,11 arc-45 55.69,11.45 68.28,24.04 arc-45 68.72,24.23 74.21,24.23 74.31,24.32 v74.9,24.32
JX1_18_N  (via drill 0.25)